# Altium PCB Power_Board.PcbDoc
Units mm, origin at the board's own origin, x right, y up, seen from the top; angles counter-clockwise.
Board outline 56.9 x 64.9 mm, 2 copper layers (Top Layer, Bottom Layer); 19 components, 15 nets, 100 pads, 4 vias.
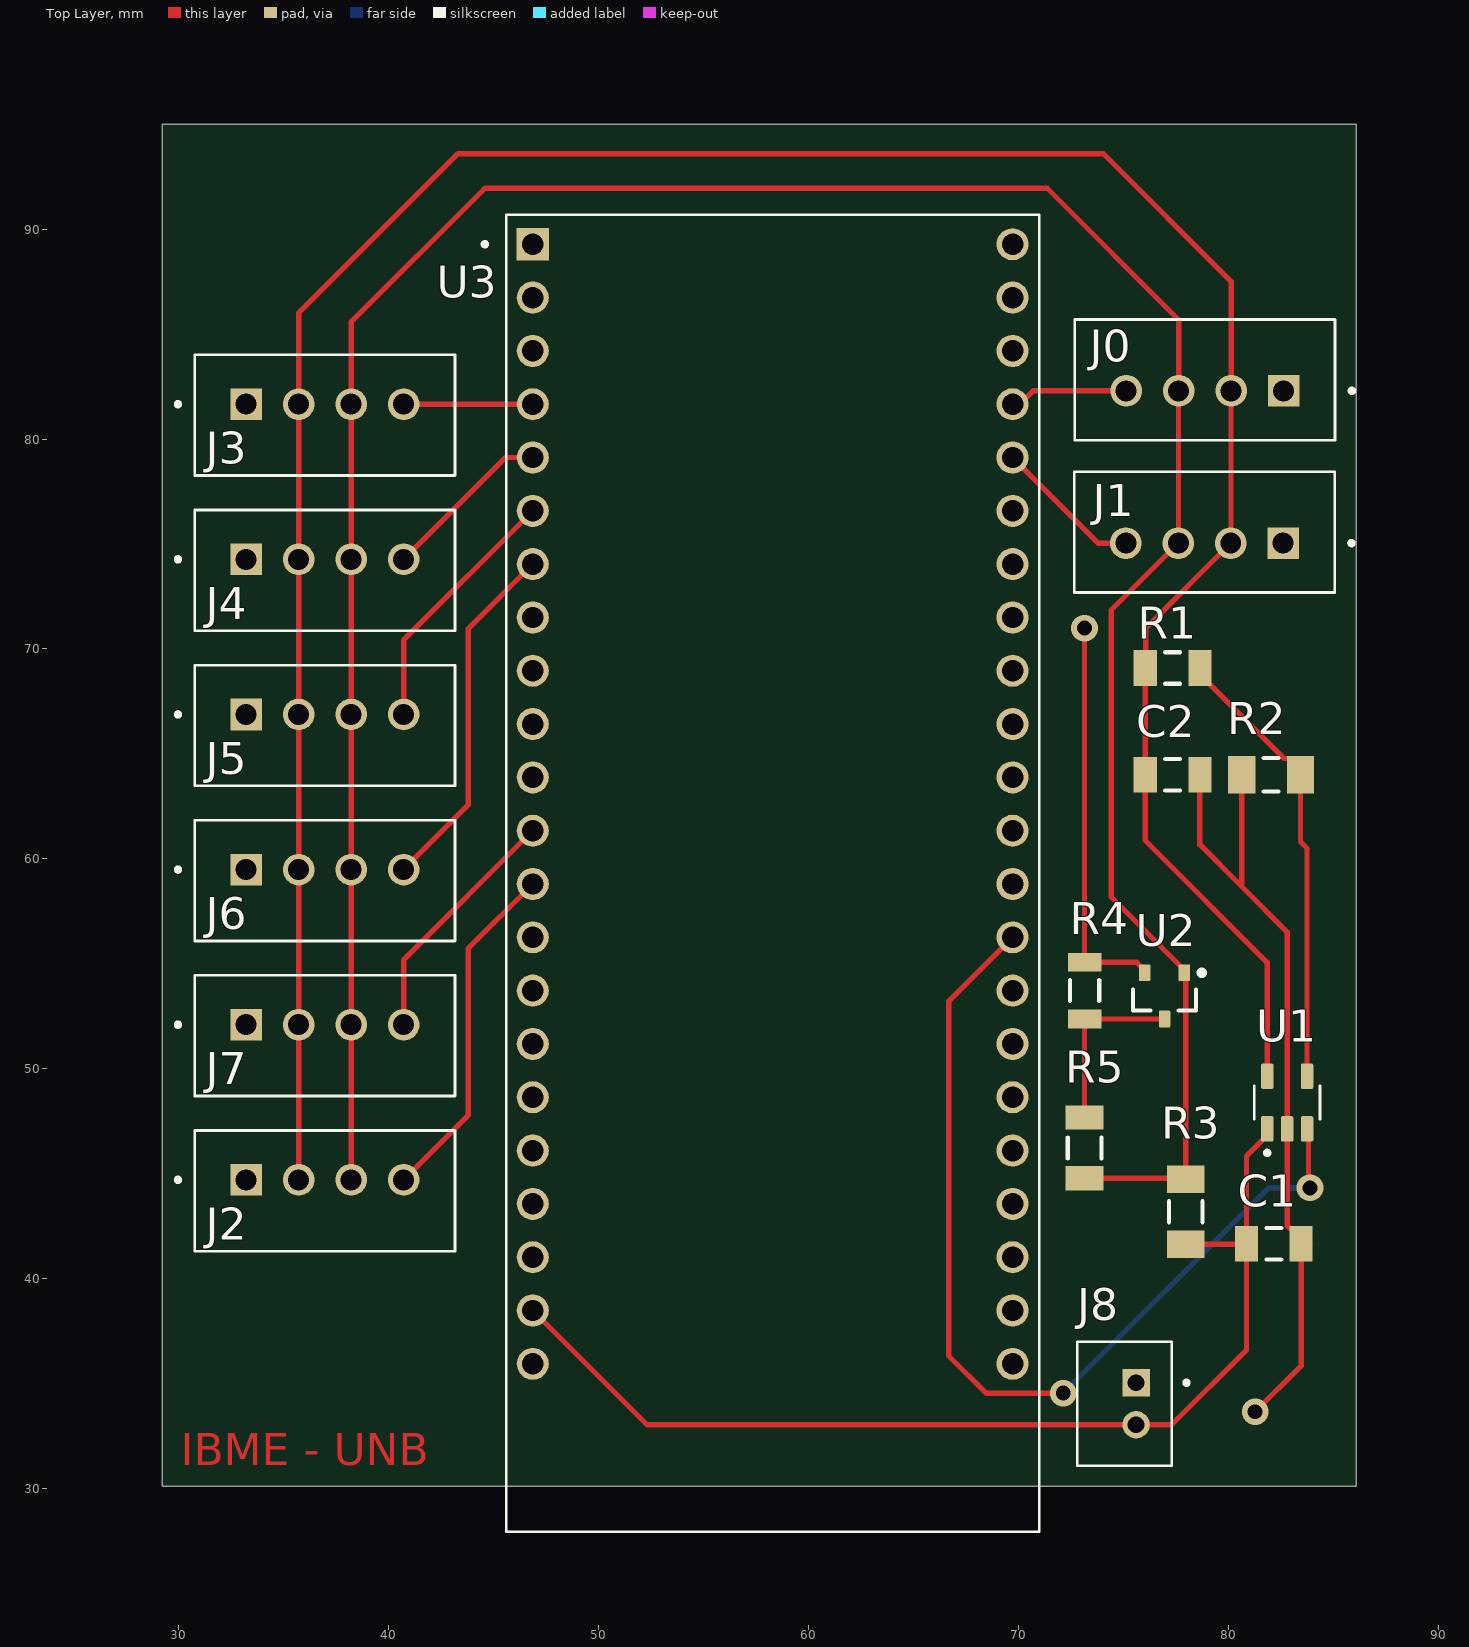
[diagram p0: Top Layer view]
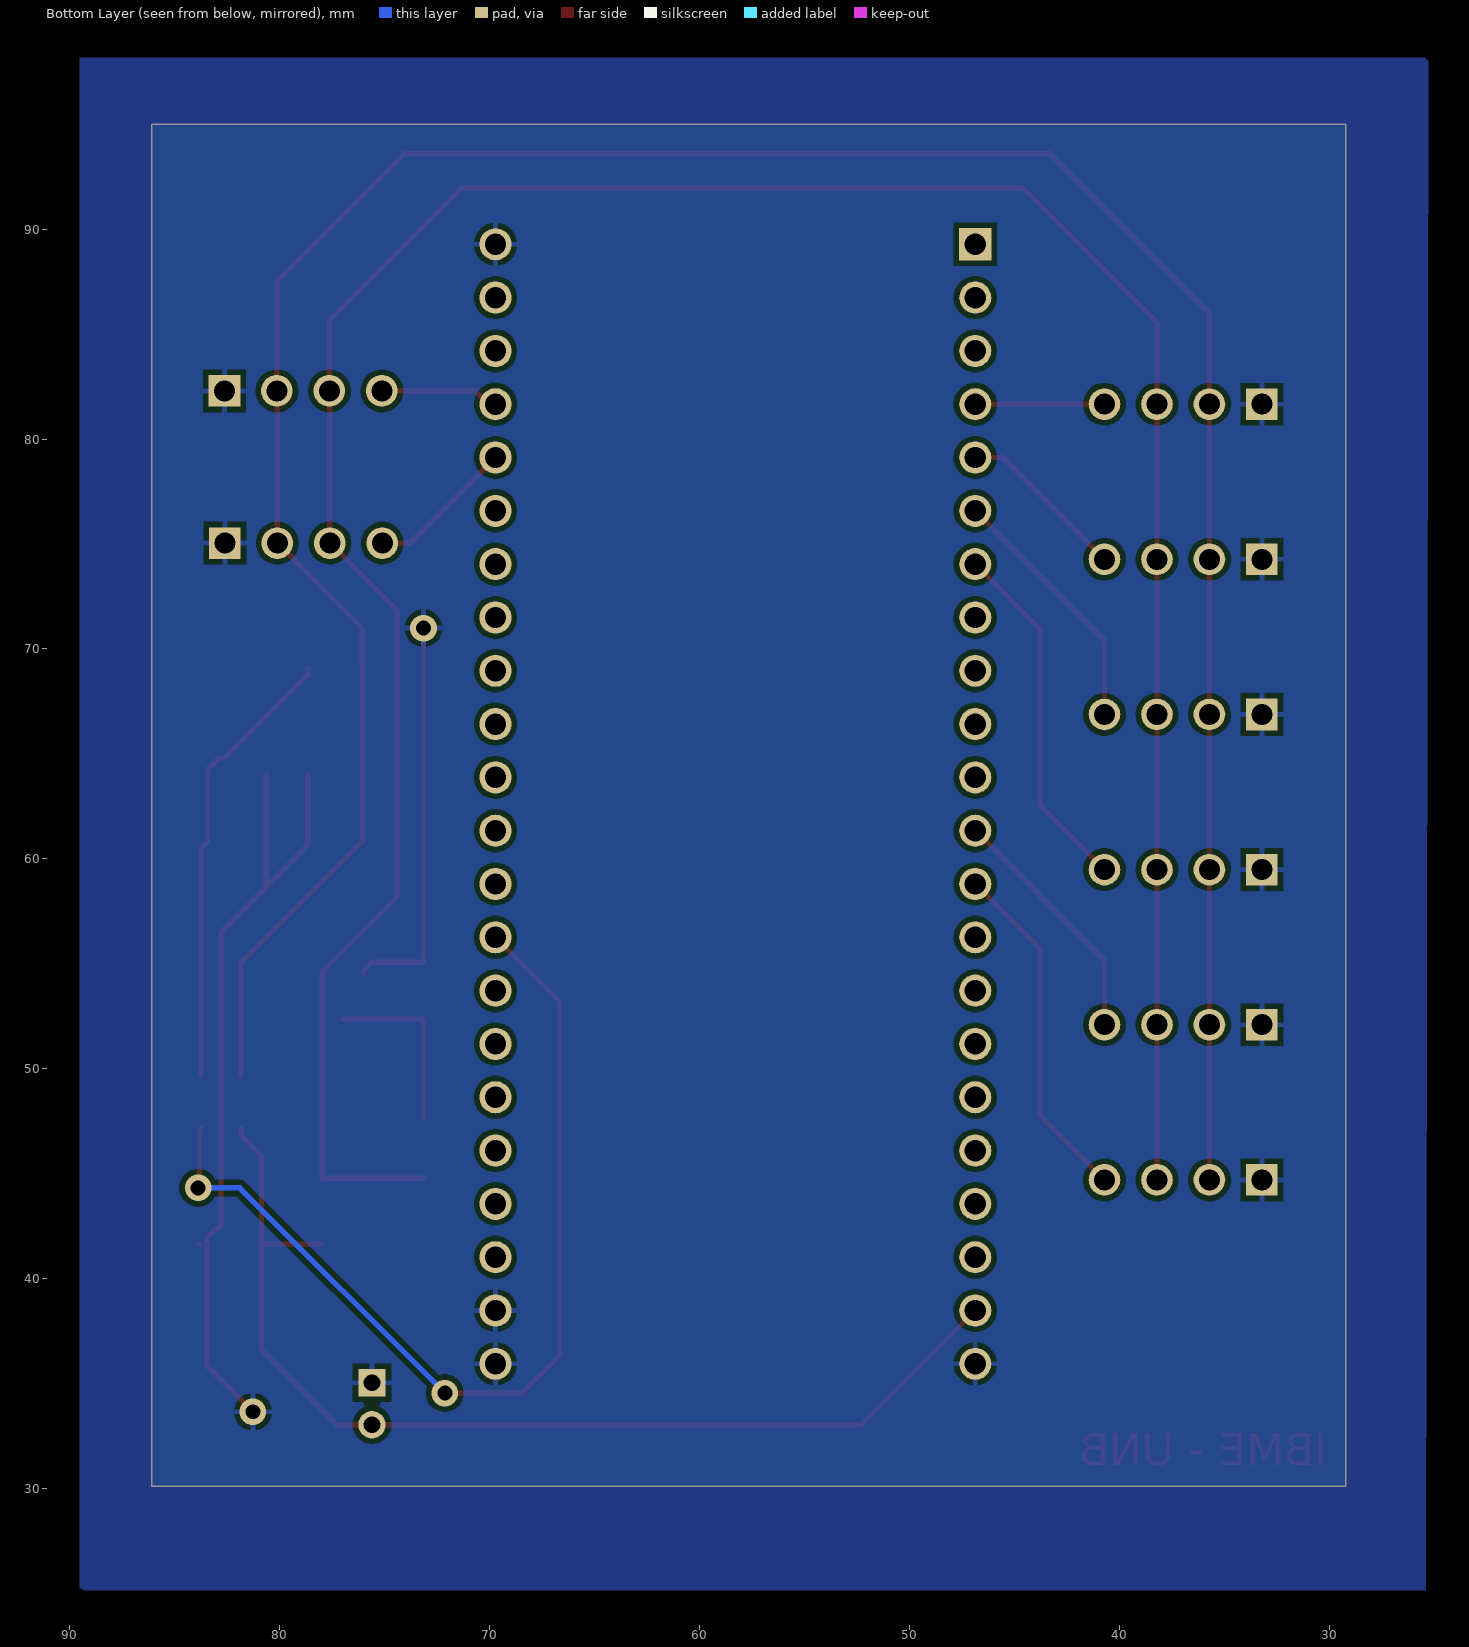
[diagram p1: Bottom Layer view, seen from below]
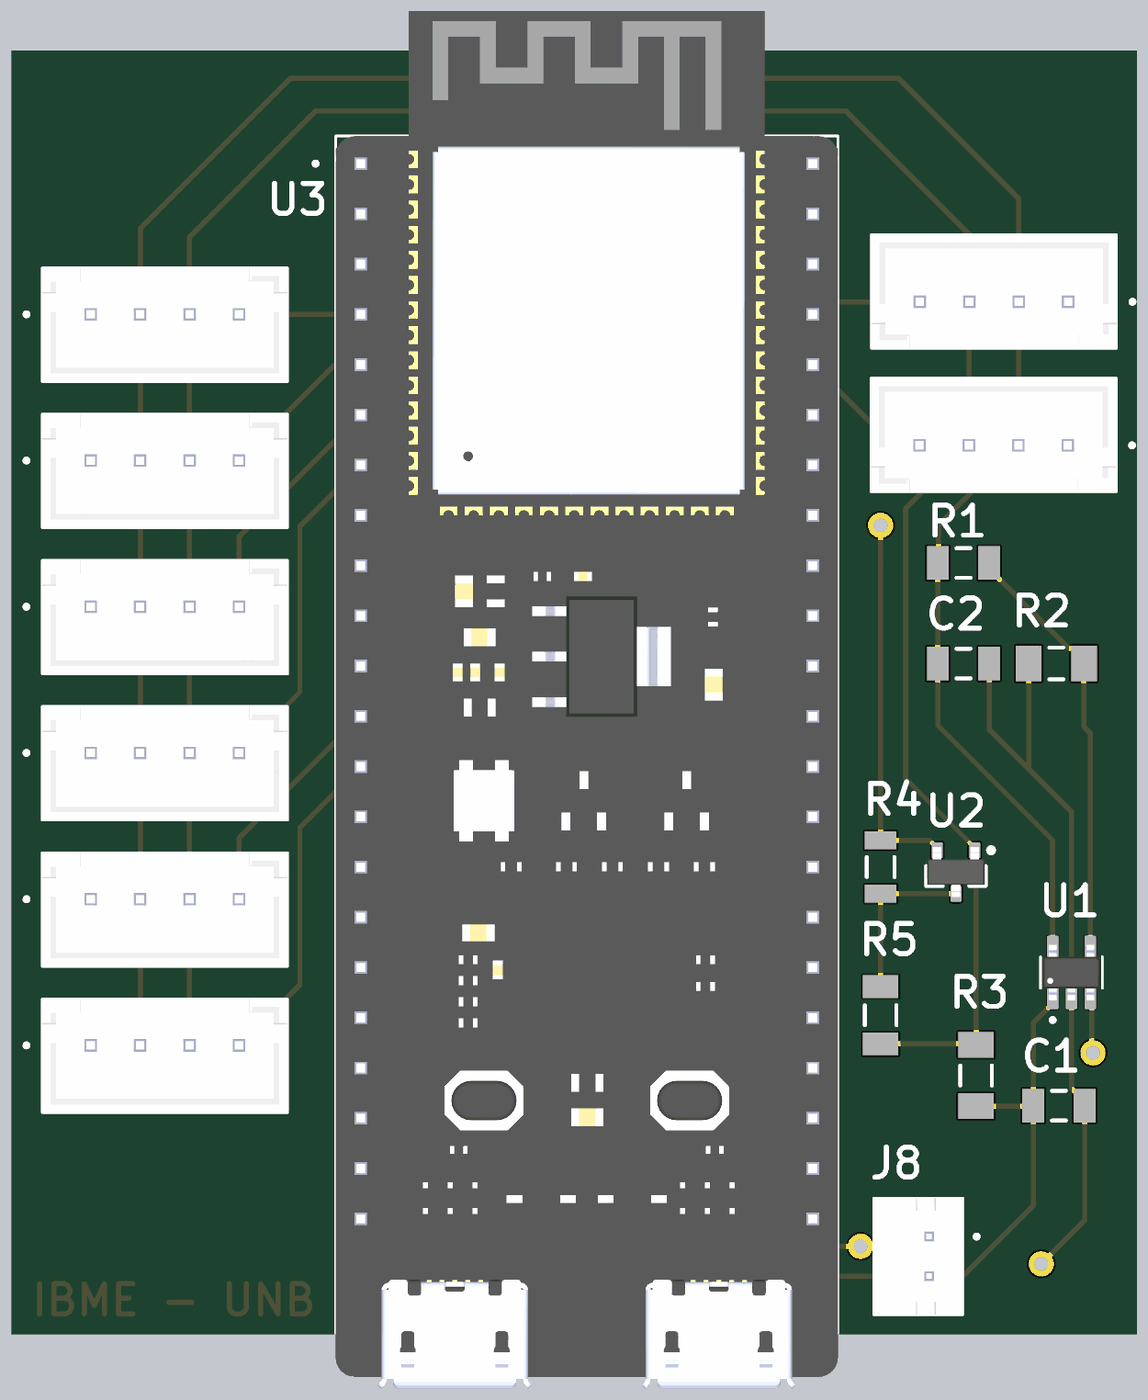
[diagram p2: 3D render of the assembled board from above, using the file's embedded part models]

## Layer stack, top to bottom
Top Solder: solder mask 0.0102, Solder Resist, Dk 3.5
Top Layer: signal copper 0.0356
Dielectric 1: dielectric 0.32, FR-4, Dk 4.8
Bottom Layer: signal copper 0.0356
Bottom Solder: solder mask 0.0102, Solder Resist, Dk 3.5

## Board outline
29.21,30.099 29.21,94.996 86.106,94.996 86.106,30.099

## Design rules (kind name [scope] priority, off if disabled: settings)
Clearance [All] p1: gap=0.254 ignorepadtopadclearanceinfootprint=FALSE
PolygonConnect [All] p1: connectstyle=Relief reliefconductorwidth=0.254 reliefentries=4 polygonreliefangle="90 Angle" airgapwidth=0.254
RoutingVias [All] p1: holewidth=0.711 width=1.27 viastyle="Through Hole" minholewidth=0.711 minwidth=1.27 maxholewidth=0.711 maxwidth=1.27
SolderMaskExpansion [All] p1: expansion=0.102 istentingtop=FALSE
SupplyNets "Schematic Supply Nets_2" [InNet('1.65V')] p1: voltage=0.000
SupplyNets "Schematic Supply Nets_5" [InNet('3.4V')] p2: voltage=0.000
SupplyNets "Schematic Supply Nets_1" [InNet('3.7V')] p3: voltage=0.000
SupplyNets "Schematic Supply Nets" [InNet('GND')] p4: voltage=0.000
Width [All] p1: maxlimit=0.254 minlimit=0.254 preferedwidth=0.254
30 further rules are at their usual default settings.

## Components (designator, comment, footprint, x,y, rotation, side; value= is the part's Value field where it differs from the comment)
C1 "1uF" CAPC3216X110X50LL20T25 82.169,41.656 r180 top
C2 "1uF" CAPC3216X110X50LL20T25 77.343,64.008 r0 top
J0 "B4B-XH-A(LF)(SN)" JST_B4B-XH-A(LF)(SN) 78.887,82.821 r0 top
J1 "B4B-XH-A(LF)(SN)" JST_B4B-XH-A(LF)(SN) 78.867,75.565 r0 top
J2 "B4B-XH-A(LF)(SN)" JST_B4B-XH-A(LF)(SN) 36.957,44.179 r180 top
J3 "B4B-XH-A(LF)(SN)" JST_B4B-XH-A(LF)(SN) 36.957,81.136 r180 top
J4 "B4B-XH-A(LF)(SN)" JST_B4B-XH-A(LF)(SN) 36.957,73.745 r180 top
J5 "B4B-XH-A(LF)(SN)" JST_B4B-XH-A(LF)(SN) 36.957,66.353 r180 top
J6 "B4B-XH-A(LF)(SN)" JST_B4B-XH-A(LF)(SN) 36.957,58.962 r180 top
J7 "B4B-XH-A(LF)(SN)" JST_B4B-XH-A(LF)(SN) 36.957,51.57 r180 top
J8 "B2B-PH-K-S(LF)(SN)" JST_B2B-PH-K-S(LF)(SN) 75.057,34.036 r90 top
R1 "62k" RESC3216X70X50LL20T25 77.343,69.088 r180 top
R2 "12k" RESC3216X70X50NL20T25 82.042,64.008 r0 top
R3 "220" RESC3216X60X45ML10T20 77.978,43.18 r90 top
R4 "15k" RESC3216X60X45LL10T20 73.152,53.721 r270 top
R5 "43k" RESC1206(3216)_N 73.152,46.228 r270 top value="43000.00 Ohm"
U1 "TLV75801PDBVR" SOT95P280X145-5N 82.804,48.387 r90 top
U2 "LM4041D12IDBZR" DBZ0003A_L 76.962,53.467 r270 top
U3 "ESP32-S3-DEVKITC-1-N8R2" XCVR_ESP32-S3-DEVKITC-1-N8R2 58.293,59.309 r0 top

## Footprints (in the part's own frame and the unit in brackets; to place one, negate y for a bottom-side part, rotate by r counter-clockwise, add the part's x,y. Pads: shape width x height; smd on the part's side, far side on the other; paste and mask are expansions set on the pad)
CAPC3216X110X50LL20T25 [mm] "Chip Capacitor, 2-Leads, Body 3.20x1.60mm, IPC High Density"
  rect 1.1x1.7 smd: 1(-1.3,0) 2(1.3,0)
  silkscreen extent -0.35,-0.75 0.35,0.75, body extent -1.7,-0.9 1.7,0.9, height 1.1
DBZ0003A_L [mm] "SOT23, 3-Leads, Body 3.04x1.4mm, Pitch 0.95mm, IPC High Density"
  rrect18% 0.8x0.55 smd: 1(-1.1,0.95) 2(-1.1,-0.95) 3(1.1,0)
  silkscreen extent -1.22,-1.5 0.7,1.9, body extent -1.26,-1.46 1.26,1.46, height 0.96
JST_B2B-PH-K-S(LF)(SN) [mm]
  rect 1.308x1.308 / inner round 1.308 / far side rect 1.308x1.308 hole 0.8: 1(1,-0.55)
  round 1.308 hole 0.8: 2(-1,-0.55)
  silkscreen extent -2.95,-3.05 2.95,2.25, body extent -2.95,-2.25 2.95,2.25, height 6
JST_B4B-XH-A(LF)(SN) [mm]
  rect 1.508x1.508 / inner round 1.508 / far side rect 1.508x1.508 hole 1: 1(3.75,-0.525)
  round 1.508 hole 1: 2(1.25,-0.525) 3(-1.25,-0.525) 4(-3.75,-0.525)
  silkscreen extent -6.2,-2.88 7.1,2.88, body extent -6.2,-2.88 6.2,2.88, height 7
RESC1206(3216)_N [mm] "Chip Resistor, Body 3.2x1.6mm, IPC Medium Density"
  rect 1.15x1.8 smd: 1(-1.45,0) 2(1.45,0)
  silkscreen extent -0.5,-0.8 0.5,0.8, body extent -1.67,-0.87 1.67,0.87, height 0.75
RESC3216X60X45LL10T20 [mm] "Chip Resistor, 2-Leads, Body 3.20x1.60mm, IPC High Density"
  rect 0.9x1.6 smd: 1(-1.35,0) 2(1.35,0)
  silkscreen extent -0.5,-0.7 0.5,0.7, body extent -1.65,-0.85 1.65,0.85, height 0.6
RESC3216X60X45ML10T20 [mm] "Chip Resistor, 2-Leads, Body 3.20x1.60mm, IPC Low Density"
  rect 1.3x1.8 smd: 1(-1.55,0) 2(1.55,0)
  silkscreen extent -0.5,-0.8 0.5,0.8, body extent -1.65,-0.85 1.65,0.85, height 0.6
RESC3216X70X50LL20T25 [mm] "Chip Resistor, 2-Leads, Body 3.20x1.60mm, IPC High Density"
  rect 1.1x1.7 smd: 1(-1.3,0) 2(1.3,0)
  silkscreen extent -0.35,-0.75 0.35,0.75, body extent -1.7,-0.9 1.7,0.9, height 0.7
RESC3216X70X50NL20T25 [mm] "Chip Resistor, 2-Leads, Body 3.20x1.60mm, IPC Medium Density"
  rect 1.3x1.8 smd: 1(-1.4,0) 2(1.4,0)
  silkscreen extent -0.35,-0.8 0.35,0.8, body extent -1.7,-0.9 1.7,0.9, height 0.7
SOT95P280X145-5N [mm]
  rrect25% 1.21x0.59 smd mask+0.05: 1(-1.255,0.95) 2(-1.255,0) 3(-1.255,-0.95) 4(1.255,-0.95) 5(1.255,0.95)
  silkscreen extent -2.5,-1.57 0.8,1.57, body extent -1.4,-1.45 1.4,1.45, height 1.45
XCVR_ESP32-S3-DEVKITC-1-N8R2 [mm]
  rect 1.53x1.53 / inner round 1.53 / far side rect 1.53x1.53 hole 1.02: J1_1(-11.43,29.97)
  round 1.53 hole 1.02: J1_2(-11.43,27.43) J1_3(-11.43,24.89) J1_4(-11.43,22.35) J1_5(-11.43,19.81) J1_6(-11.43,17.27) J1_7(-11.43,14.73) J1_8(-11.43,12.19) J1_9(-11.43,9.65) J1_10(-11.43,7.11) J1_11(-11.43,4.57) J1_12(-11.43,2.03) J1_13(-11.43,-0.51) J1_14(-11.43,-3.05) J1_15(-11.43,-5.59) J1_16(-11.43,-8.13) J1_17(-11.43,-10.67) J1_18(-11.43,-13.21) J1_19(-11.43,-15.75) J1_20(-11.43,-18.29) J1_21(-11.43,-20.83) J1_22(-11.43,-23.37) J3_1(11.43,29.97) J3_2(11.43,27.43) J3_3(11.43,24.89) J3_4(11.43,22.35) J3_5(11.43,19.81) J3_6(11.43,17.27) J3_7(11.43,14.73) J3_8(11.43,12.19) J3_9(11.43,9.65) J3_10(11.43,7.11) J3_11(11.43,4.57) J3_12(11.43,2.03) J3_13(11.43,-0.51) J3_14(11.43,-3.05) J3_15(11.43,-5.59) J3_16(11.43,-8.13) J3_17(11.43,-10.67) J3_18(11.43,-13.21) J3_19(11.43,-15.75) J3_20(11.43,-18.29) J3_21(11.43,-20.83) J3_22(11.43,-23.37)
  silkscreen extent -13.82,-31.37 12.7,31.37, body extent -12.7,-31.96 12.7,37.68, height 7.39

## Part data
C1 C2: library part CMP-2000-06011-1, "Chip Capacitor, 1 uF, +/- 10%, 50 V, -55 to 125 degC, 1206 (3216 Metric), RoHS, Tape and Reel", Capacitance - nF=1000nF, Case Code - in=1206, Case Code - mm=3216, Case Height=1mm, Case Length=3.2mm, Case Width=1.6mm, Dielectric=X7R, Manufacturer=Kemet, Maximum Operating Temperature=+125C, Minimum Operating Temperature=-55C, Operating Temperature Range=-55Cto+125C, Package / Case=1206(3216metric), Package Description="2-Pin Surface Mount Device, Body 3.2 x 1.6 mm", Temperature Coefficient / Code=+/-15%, Tolerance=10%, Voltage Rating=50V, Brand=Kemet, Capacitance=1uF, Class=Class1, Datasheet URL=http://www.kemet.com/docfinder?Partnumber=C1206C105K5RACTU, Datasheet Version=02/2016, Dimensions=1.6mmWx3.2mmLx1mmH, Factory Pack Quantity=2500, Manufacturer URL=http://www.kemet.com/, Mounting Technology=SurfaceMount, Package Reference=1206, Packaging=Reel, Product=GeneralTypeMLCCs, Product Category=MultilayerCeramicCapacitorsMLCC-SMD/SMT, RoHS=Details, Series=C1206C, Termination Style=SMD/SMT, Type=SMDMLCCX7R6.3-250VDCCommericalGrade, Voltage Rating DC=50V
J0 J1 J2 J3 J4 J5 J6 J7: "Connector Header Through Hole 4 position 0.098 (2.50mm)", Package=None, Check_prices=https://www.snapeda.com/parts/B4B-XH-A(LF)(SN)/JST+Sales+America+Inc./view-part/?ref=eda, MF="JST Sales", MP=B4B-XH-A(LF)(SN), SnapEDA_Link=https://www.snapeda.com/parts/B4B-XH-A(LF)(SN)/JST+Sales+America+Inc./view-part/?ref=snap
J8: "Connector Header Through Hole 2 position 0.079 (2.00mm)", Package=None, Check_prices=https://www.snapeda.com/parts/B2B-PH-K-S%20(LF)(SN)/JST/view-part/?ref=eda, MF=JST, MP="B2B-PH-K-S (LF)(SN)", SnapEDA_Link=https://www.snapeda.com/parts/B2B-PH-K-S%20(LF)(SN)/JST/view-part/?ref=snap
R1: library part CMP-2003-04487-1, Manufacturer=Panasonic, Part Number=ERA8AEB623V
R2: library part CMP-2003-04416-1, Manufacturer=Panasonic, Part Number=ERA8AEB123V
R3: library part CMP-2003-01956-1, Manufacturer="Vishay Dale", Part Number=CRCW1206220RFKEA
R4: library part CMP-2003-01817-1, Manufacturer="Vishay Dale", Part Number=CRCW120615K0FKEA
R5: library part CMP-1014-00113-1, "43K 0.25W 5% 1206 (3216 Metric)  SMD", Case-EIA=1206, Case-Metric=3216, Power="0.25 W", Tolerance="5 %", Technology=SMT
U1: "500-mA, low-IQ, high-accuracy, adjustable ultra-low-dropout voltage regulator with enable", Package="SOT-23-5 Texas Instruments", Check_prices=https://www.snapeda.com/parts/TLV75801PDBVR/Texas+Instruments/view-part/?ref=eda, MF="Texas Instruments", MP=TLV75801PDBVR, SnapEDA_Link=https://www.snapeda.com/parts/TLV75801PDBVR/Texas+Instruments/view-part/?ref=snap
U2: library part CMP-0366-00846-2, "Precision Micropower Shunt Voltage Reference, 1.0% accuracy, 1.225 V, 15 ppm / degC, 12 mA, -40 to 85 degC, 3-pin SOT-23 (DBZ), Green (RoHS & no Sb/Br)", Manufacturer="Texas Instruments", Rating=Catalog, Temp Coeff(Max)(ppm/ degree C)=150, Temp Coeff(Typ)(ppm/ degree C)=15, Code_JEDEC=TO-236, ComponentLink1Description="Manufacturer URL", ComponentLink1URL=http://www.ti.com/, ComponentLink2Description=Datasheet, ComponentLink2URL=http://www.ti.com/general/docs/lit/getliterature.tsp?genericPartNumber=LM4041D12&fileType=pdf, ComponentLink3Description="Package Specification", ComponentLink3URL=http://www.ti.com/litv/pdf/mpds108a, DatasheetVersion=SLCS146E, Eco-Plan="Green (RoHS & no Sb/Br)", Initial Accuracy @ 25/deg C(%)=1, Iout/Iz(Max)(mA)=12, Min Iz for Regulation(uA)=60, Mounting Technology="Surface Mount", PackageDescription="3-Pin Plastic Small Outline, Body 2.92 x 1.3 mm, Pitch 0.95 mm", PackageReference=DBZ0003A, PackageVersion=4203227/B, PartNumber=LM4041D12IDBZR, SubFamily="Shunt Voltage Reference", VO(V)=1.225
U3: "WiFi Development Tools - 802.11 (Engineering Samples Only) ESP32-S3 General-Purpose Development Board, ESP32-S3-WROOM-1-N8R2, with Pin Header", Package=None, Check_prices=https://www.snapeda.com/parts/ESP32-S3-DEVKITC-1-N8R2/Espressif+Systems/view-part/?ref=eda, MF="Espressif Systems", MP=ESP32-S3-DEVKITC-1-N8R2, SnapEDA_Link=https://www.snapeda.com/parts/ESP32-S3-DEVKITC-1-N8R2/Espressif+Systems/view-part/?ref=snap

## Via types
v1: diameter 1.27, hole 0.711, Top Layer to Bottom Layer, 4 vias

## Nets (pads, with @x,y where several pads share a name; then routed paths per layer and width w, separated by ;. In a path a pad name is that pad's centre, name@x,y a point inside that pad or via, vN(x,y) a via of type N, cw(c..) or ccw(c..) an arc to the next point about the centre after c; other vN are vias at no path point)
1.65V: J0.3 J1.3 J2.3 J3.3 J4.3 J5.3 J6.3 J7.3 R3.2 R5.2 U2.1 | length 134.1
  Top Layer w0.254: J2.3 J7.3 J6.3 J5.3 J4.3 J3.3 38.207,85.578 44.577,91.948 71.374,91.948 77.637,85.685 J0.3 77.627,82.286 77.627,75.05 J1.3 74.422,71.845 74.422,58.182 77.912,54.692 U2.1 77.978,54.501 R3.2 77.93,44.778 R5.2
3.4V: C2.1 J0.2 J1.2 J2.2 J3.2 J4.2 J5.2 J6.2 J7.2 R1.2 U1.5 | length 133.3
  Top Layer w0.254: J2.2 J7.2 J6.2 J5.2 J4.2 J3.2 35.707,85.999 43.307,93.599 74.041,93.599 80.137,87.503 J0.2 80.127,82.286 80.127,75.05 J1.2 76.073,70.996 R1.2@76.073,69.088 ; R1.2 C2.1 76.043,60.879 81.854,55.068 U1.5
3.7V: C1.2 J8.2 R3.1 U1.1 U3.J1_21 | length 51.6
  Top Layer w0.254: U3.J1_21 52.306,33.036 J8.2 77.301,33.036 80.869,36.604 C1.2@80.869,41.63 ; R3.1 C1.2@80.869,41.63 ; U1.1 81.854,46.822 80.869,45.837 C1.2 C1.2@80.869,41.63
ADC0: J0.4 U3.J3_4 | length 5.7
  Top Layer w0.254: U3.J3_4 70.068,81.659 70.705,82.296 J0.4
ADC1: J1.4 U3.J3_5 | length 7.1
  Top Layer w0.254: U3.J3_5 73.802,75.04 J1.4
ADC2: J2.4 U3.J1_13 | length 16.6
  Top Layer w0.254: J2.4 43.783,47.78 43.783,55.719 U3.J1_13
ADC3: J3.4 U3.J1_4 | length 6.2
  Top Layer w0.254: J3.4 40.708,81.66 46.862,81.66 U3.J1_4
ADC4: J4.4 U3.J1_5 | length 8.2
  Top Layer w0.254: J4.4 45.556,79.119 U3.J1_5
ADC5: J5.4 U3.J1_6 | length 12.3
  Top Layer w0.254: J5.4 40.707,70.423 U3.J1_6
ADC6: J6.4 U3.J1_7 | length 17.1
  Top Layer w0.254: J6.4 43.783,62.563 43.783,70.959 U3.J1_7
ADC7: J7.4 U3.J1_12 | length 11.8
  Top Layer w0.254: J7.4 40.707,55.183 U3.J1_12
EN: U1.3 U3.J3_14 | length 46.1
  Top Layer w0.254: U3.J3_14 66.675,53.211 66.675,36.322 68.453,34.544 v1(72.136,34.544) ; U1.3 83.823,47.063 83.823,44.392 v1(83.892,44.323)
  Bottom Layer w0.254: v1(72.136,34.544) 81.915,44.323 v1(83.892,44.323)
FB1: R1.1 R2.2 U1.4 | length 21.7
  Top Layer w0.254: R1.1 78.643,68.788 82.65,64.781 82.919,64.781 83.442,64.258 R2.2 83.442,60.814 83.754,60.502 U1.4
FB2: R4.2 R5.1 U2.3 | length 8.5
  Top Layer w0.254: R5.1 R4.2 73.156,52.367 U2.3
GND: C1.1 C2.2 J0.1 J1.1 J2.1 J3.1 J4.1 J5.1 J6.1 J7.1 J8.1 R2.1 R4.1 U1.2 U2.2 U3.J1_22 U3.J3_1 U3.J3_21 U3.J3_22 | length 57.8
  Top Layer w0.254: v1(73.152,70.993) R4.1 75.633,55.071 76.012,54.692 U2.2 ; C2.2 78.643,60.676 80.642,58.677 ; R2.1 80.642,58.677 ; v1(81.28,33.655) 83.469,35.844 83.469,41.956 83.046,42.379 82.953,42.379 82.804,42.528 U1.2 82.804,56.515 80.642,58.677 ; C1.1@83.827,41.591 C1.1@83.892,41.656
pads on no net: U3.J1_1 U3.J1_2 U3.J1_3 U3.J1_8 U3.J1_9 U3.J1_10 U3.J1_11 U3.J1_14 U3.J1_15 U3.J1_16 U3.J1_17 U3.J1_18 U3.J1_19 U3.J1_20 U3.J3_2 U3.J3_3 U3.J3_6 U3.J3_7 U3.J3_8 U3.J3_9 U3.J3_10 U3.J3_11 U3.J3_12 U3.J3_13 U3.J3_15 U3.J3_16 U3.J3_17 U3.J3_18 U3.J3_19 U3.J3_20

## Polygon pours and split planes (outlines as drawn)
GND on Bottom Layer "GND_L02_P002" (solid, pour order 2): 25.273,98.171 89.535,98.171 89.535,25.146 89.408,25.019 89.281,25.146 25.4,25.146

## Other copper
Top Layer:
  text "IBME - UNB" at 30.099,31.115 h1.52